# Altium PCB GearBOX-Main-OneLayer.PcbDoc
Units mm, origin at the board's own origin, x right, y up, seen from the top; angles counter-clockwise.
Board outline 46 x 68 mm, 2 copper layers (Top Layer, Bottom Layer), stack 1.18 mm thick; 34 components, 18 nets, 131 pads, 0 vias.
Unrouted connection lines stored in the file: 1.
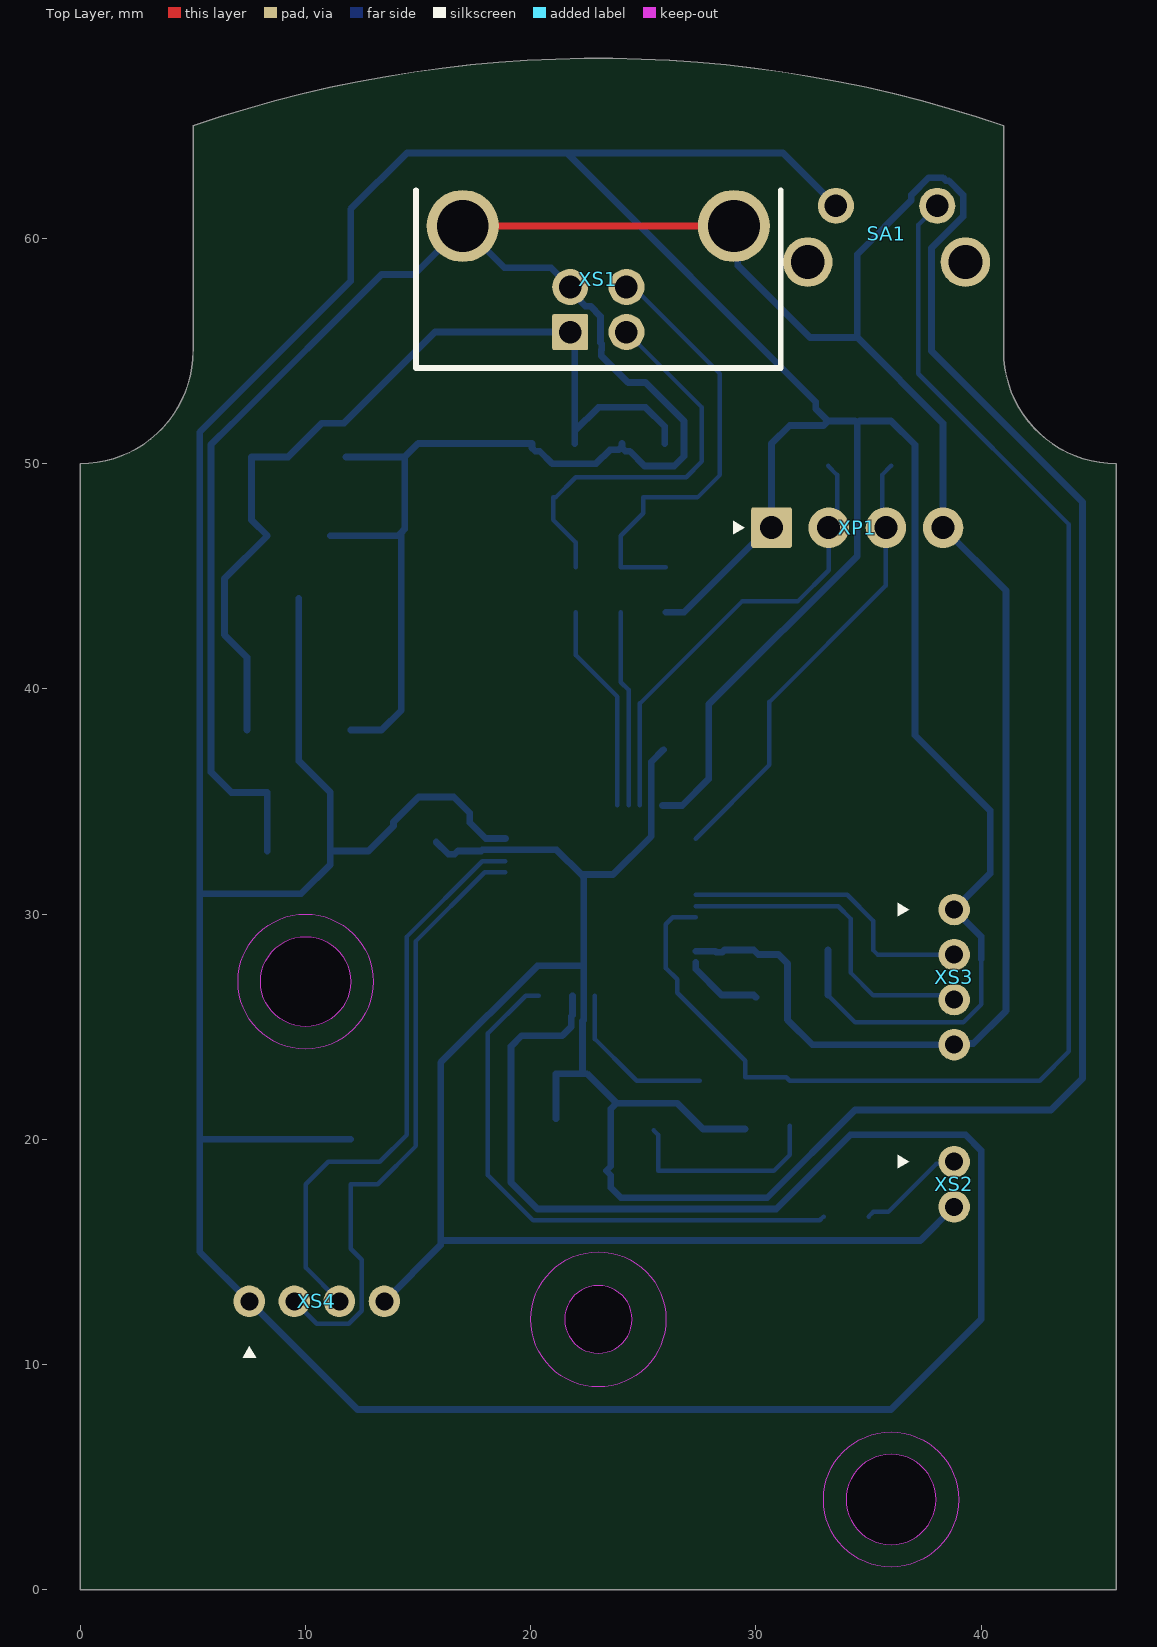
[diagram p0: Top Layer view]
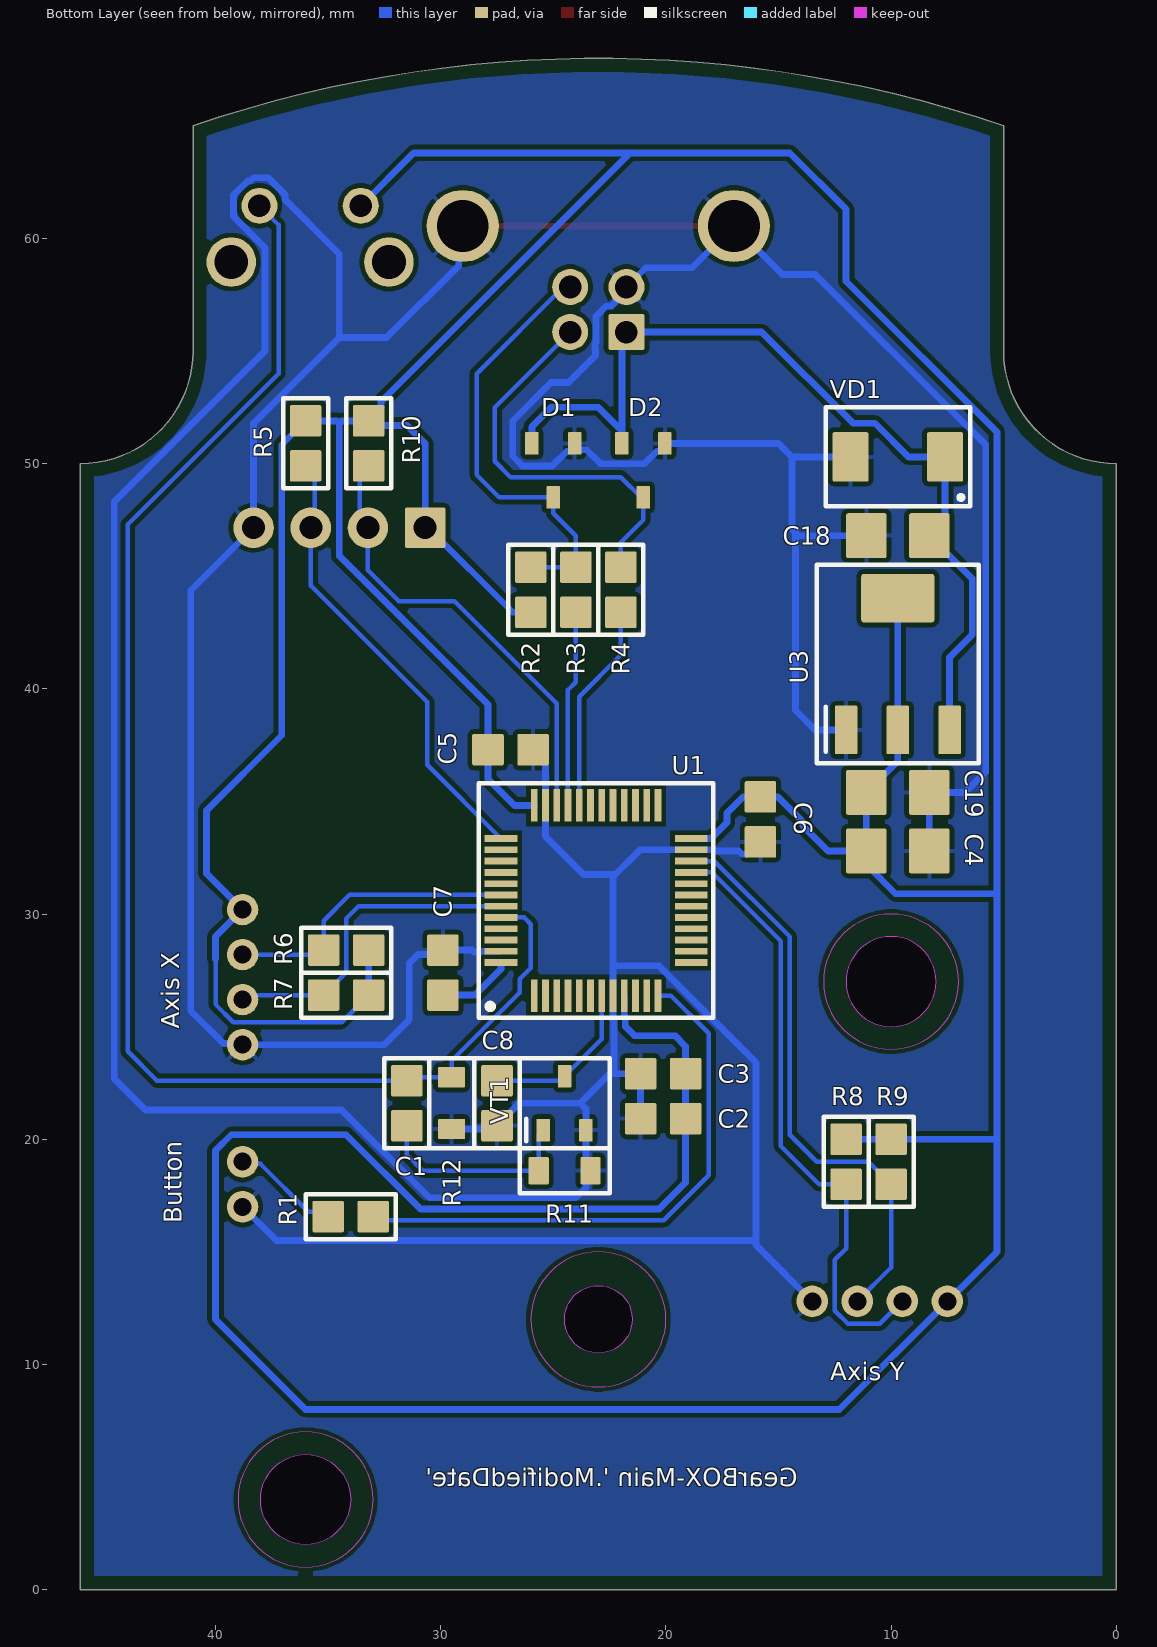
[diagram p1: Bottom Layer view, seen from below]
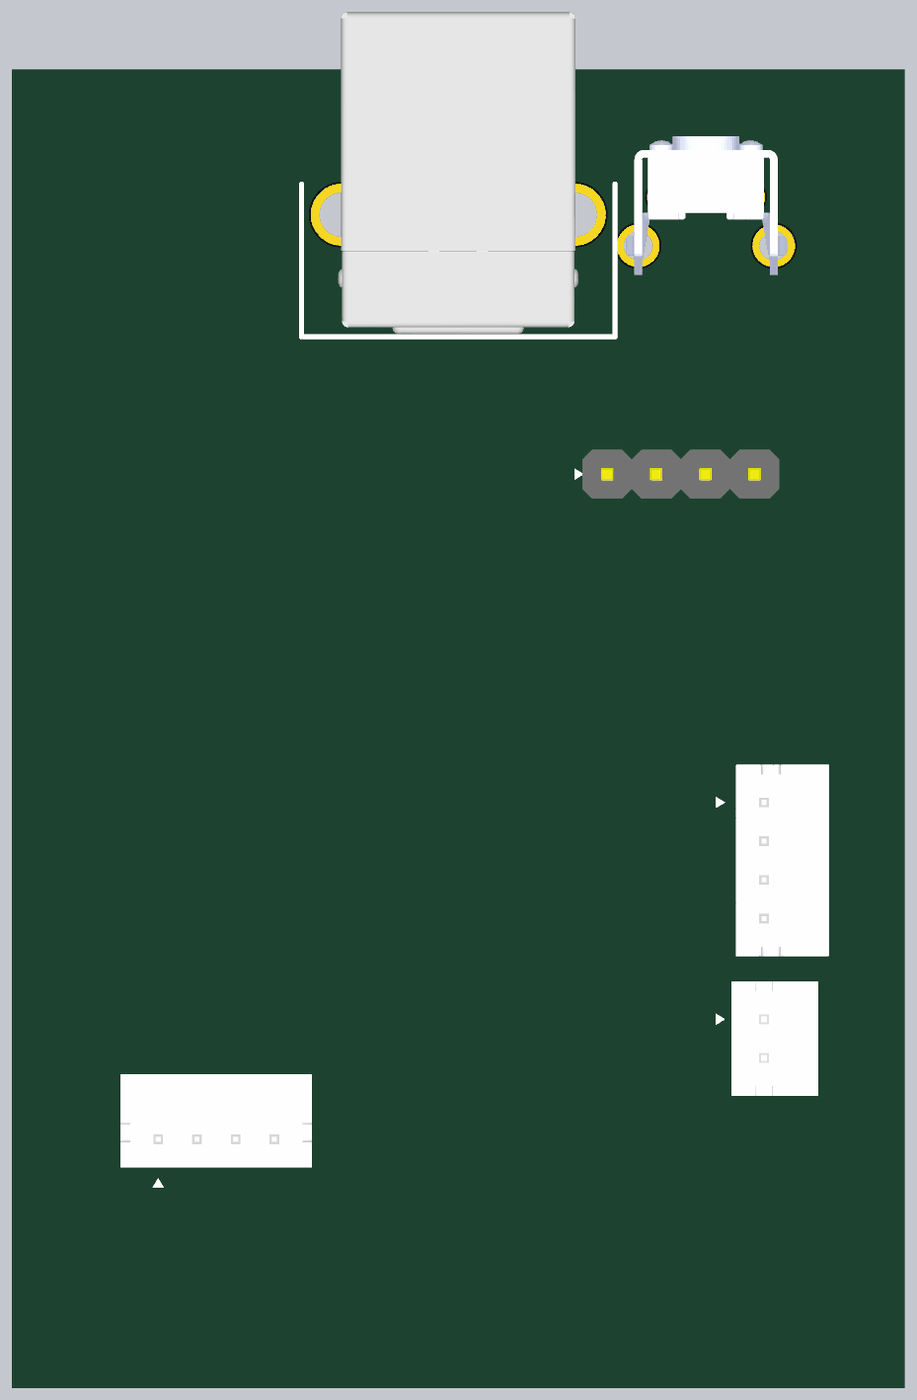
[diagram p2: 3D render of the assembled board from above, using the file's embedded part models]
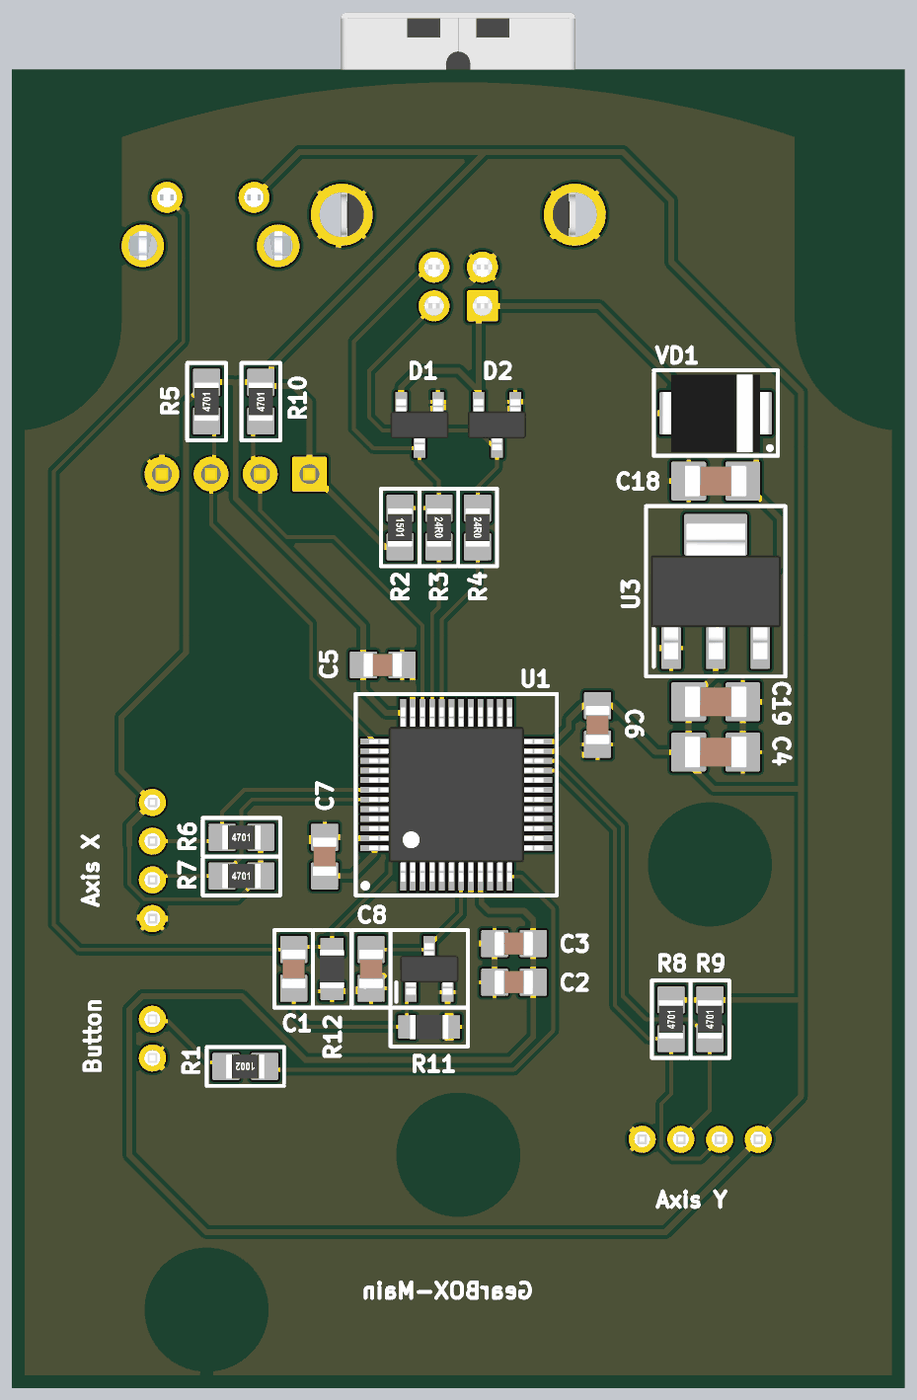
[diagram p3: 3D render of the assembled board from below, using the file's embedded part models]

## Layer stack, top to bottom
Top Solder: solder mask 0.0102, Solder Resist, Dk 3.5
Top Layer: signal copper 0.0175
Dielectric 1: core 1.145, FR4 (IPC-4101/21), Dk 4.6
Bottom Layer: signal copper 0.0175
Bottom Solder: solder mask 0.0102, Solder Resist, Dk 3.5

## Board outline
0,0 0,50 ccw(c0,55) 5,55 5,65 cw(c23,12.5) 41,65 41,55 ccw(c46,55) 46,50 46,0
cut-out: 34,4 ccw(c36,4) 36,2 ccw(c36,4) 38,4 ccw(c36,4) 36,6 ccw(c36,4)
cut-out: 21.5,12 ccw(c23,12) 23,10.5 ccw(c23,12) 24.5,12 ccw(c23,12) 23,13.5 ccw(c23,12)
cut-out: 10,25 cw(c10,27) 8,27 cw(c10,27) 10,29 cw(c10,27) 12,27 cw(c10,27)

## Design rules (kind name [scope] priority, off if disabled: settings)
AcuteAngle [All] p1: minimum=4.50000000000000E+0001 checktracksonly=TRUE
BoardOutlineClearance "NanoPi-NEO BoardOutlineClearance" [WithinRoom('NanoPi-NEO Board Room')] p1: gap=0.4 ignorepadtopadclearanceinfootprint=FALSE
BoardOutlineClearance [All] p2: gap=0.6 ignorepadtopadclearanceinfootprint=FALSE
Clearance [All] p1: gap=0.2 ignorepadtopadclearanceinfootprint=FALSE
ComponentClearance [All] p1: gap=-0.2 collisioncheckmode=3 verticalgap=0.2 showdistances=FALSE
Height "NanoPi-NEO Connector Avoid" [(WithinRoom('NanoPi-NEO Ethernet Room')or WithinRoom('NanoPi-NEO USB Room')) and OnTopLayer] p1: minheight=0 maxheight=1.2 prefheight=1
Height "NanoPi-NEO Board Avoid" [WithinRoom('NanoPi-NEO Board Room') and OnTopLayer] p2: minheight=0 maxheight=13.5 prefheight=13
Height "Height Top" [OnTop] p3: minheight=0 maxheight=20 prefheight=20
Height "Height Bottom" [OnBottom] p4: minheight=0 maxheight=3 prefheight=3
HoleSize [All] p1: absolutevalues=TRUE maxlimit=2539.975 minlimit=0.3 maxpercent=80.000 minpercent=20.000
HoleToHoleClearance [All] p1: gap=0.2 allowstackedmicrovias=TRUE
MinimumSolderMaskSliver MinimumSolderMaskSliver_1 [WithinRoom('ChargerRoom')] p1: minsoldermaskwidth=0.1
MinimumSolderMaskSliver [All] p2: minsoldermaskwidth=0.1
PolygonConnect [All] p1: thpad.connectstyle=Relief thpad.reliefconductorwidth=0.2 thpad.reliefentries=4 thpad.polygonreliefangle="45 Angle" thpad.airgapwidth=0.2 smdpad.connectstyle=Relief smdpad.reliefconductorwidth=0.2 smdpad.reliefentries=4 smdpad.polygonreliefangle="90 Angle" smdpad.airgapwidth=0.2 via.connectstyle=Direct via.reliefconductorwidth=0.254 via.reliefentries=4 via.polygonreliefangle="90 Angle" via.airgapwidth=0.254
RoutingVias [All] p1: holewidth=0.3 width=0.6 viastyle="Through Hole" minholewidth=0.3 minwidth=0.6 maxholewidth=1 maxwidth=2
SilkToSilkClearance [All] p1: silktosilkclearance=-100
SilkToSolderMaskClearance [IsPad] p1: minsilkscreentomaskgap=0 clearancetoexposedcopper=TRUE
SolderMaskExpansion ViaTent [IsVia] p1: expansion=0.102 istentingtop=TRUE
SolderMaskExpansion SolderMaskExpansion_1 [WithinRoom('ChargerRoom')] p2: expansion=0.05 istentingtop=FALSE
SolderMaskExpansion [All] p3: expansion=0.102 istentingtop=FALSE
Width [All] p1: maxlimit=10 minlimit=0.2 preferedwidth=0.2
23 further rules are at their usual default settings.

## Classes and differential pairs
component class BootUp: C1 C8 R11 R12 SA1 VT1
component class USB: D1 D2 R2 R3 R4 VD1 XS1
component class MCU: C2 C3 C4 C5 C6 C7 R1 R5 R6 R7 R8 R9 R10 U1 XP1 XS2 XS3 XS4
component class SUPPLY_DC3V3: C18 C19 U3

## Components (designator, comment, footprint, x,y, rotation, side; value= is the part's Value field where it differs from the comment)
C1 "CL21B104MBFNNNE" "Normal_Capacitor_Standard_0805-L2000-W1250-BW500-H1350 - OVERLAY" 31.5,21.6 r270 bottom value=100N/X7R/50V/±20%
C2 "CL21B105MBFNNNE" Normal_Capacitor_Standard_0805-L2000-W1250-BW500-H1350 20.125,20.912 r180 bottom value=1U/X7R/50V/±20%
C3 "CL21B104MBFNNNE" Normal_Capacitor_Standard_0805-L2000-W1250-BW500-H1350 20.125,22.912 r180 bottom value=100N/X7R/50V/±20%
C4 "CL31B475KBHNNNE" Normal_Capacitor_Standard_1206-L3200-W1600-BW1250-H1600 9.7,32.8 r0 bottom value=4U7/X7R/50V/±10%
C5 "CL21B104MBFNNNE" Normal_Capacitor_Standard_0805-L2000-W1250-BW500-H1350 26.9,37.3 r0 bottom value=100N/X7R/50V/±20%
C6 "CL21B104MBFNNNE" Normal_Capacitor_Standard_0805-L2000-W1250-BW500-H1350 15.8,34.2 r90 bottom value=100N/X7R/50V/±20%
C7 "CL21B104MBFNNNE" Normal_Capacitor_Standard_0805-L2000-W1250-BW500-H1350 29.9,27.4 r270 bottom value=100N/X7R/50V/±20%
C8 "CL21B104MBFNNNE" "Normal_Capacitor_Standard_0805-L2000-W1250-BW500-H1350 - OVERLAY" 27.5,21.6 r90 bottom value=100N/X7R/50V/±20%
C18 "CL31B106KBHNNNE" Normal_Capacitor_Standard_1206-L3200-W1600-BW1250-H1600 9.7,46.8 r180 bottom value=10U/X7R/50V/±10%
C19 "CL31B106KBHNNNE" Normal_Capacitor_Standard_1206-L3200-W1600-BW1250-H1600 9.7,35.4 r0 bottom value=10U/X7R/50V/±10%
D1 "BAV99L" 3-SOT23 25,49.7 r270 bottom
D2 "BAV99L" 3-SOT23 21,49.7 r270 bottom
R1 "CR0805-10K-1%" SMD_RES_0805-L2000-W1250-H500-M1002 34,16.565 r0 bottom value=10K/1%
R2 "CR0805-1K5-1%" SMD_RES_0805-L2000-W1250-H500-M1501 26,44.4 r270 bottom value=1K5/1%
R3 "CR0805-24R-1%" SMD_RES_0805-L2000-W1250-H500-M24R0 24,44.4 r270 bottom value=24R/1%
R4 "CR0805-24R-1%" SMD_RES_0805-L2000-W1250-H500-M24R0 22,44.4 r270 bottom value=24R/1%
R5 "CR0805-4K7-1%" SMD_RES_0805-L2000-W1250-H500-M4701 33.2,50.9 r90 bottom value=4K7/1%
R6 "CR0805-4K7-1%" SMD_RES_0805-L2000-W1250-H500-M4701 34.2,28.4 r180 bottom value=4K7/1%
R7 "CR0805-4K7-1%" SMD_RES_0805-L2000-W1250-H500-M4701 34.2,26.4 r180 bottom value=4K7/1%
R8 "CR0805-4K7-1%" SMD_RES_0805-L2000-W1250-H500-M4701 12,19 r90 bottom value=4K7/1%
R9 "CR0805-4K7-1%" SMD_RES_0805-L2000-W1250-H500-M4701 10,19 r90 bottom value=4K7/1%
R10 "CR0805-4K7-1%" SMD_RES_0805-L2000-W1250-H500-M4701 36,50.9 r90 bottom value=4K7/1%
R11 "RC2012(0805)" CHIPRESISTOR-0805-L2000-W1250-B350-H550-Overlay-L4000-W2000 24.5,18.6 r0 bottom value=100K/1%
R12 "RC2012(0805)" CHIPRESISTOR-0805-L2000-W1250-B350-H550-Overlay-L4000-W2000 29.518,21.6 r90 bottom value=10K/1%
SA1 "DS1041-21-2038KKA10010" DS1041-21-2038KKA10010 35.8,60.2 r0 top
U1 "STM32F072C8T6TR" 48-LQFP 23.1,30.6 r90 bottom
U3 "LM1117DT-3.3/NOPB" SOT223 9.7,41.1 r90 bottom
VD1 "SMBJ5.0A" 2-MOLDED-E4600-D4000-A2700-H5600-B2200 9.7,50.3 r0 bottom
VT1 "BSS138" "3-SOT23 - OVERLAY" 24.5,21.6 r90 bottom
XP1 "DS1021-1X04SF11-B" DS1021-1X04SF11-B 34.5,47.155 r0 top
XS1 "DS1099-WN0" DS1099 23,58.2 r180 top locked
XS2 "DS1066-02MVW6X" DS1066-02MVW6X 38.8,18 r270 top
XS3 "DS1066-04MVW6X" DS1066-04MVW6X 38.8,27.2 r270 top
XS4 "DS1066-04MVW6X" DS1066-04MVW6X 10.5,12.8 r0 top

## Footprints (in the part's own frame and the unit in brackets; to place one, negate y for a bottom-side part, rotate by r counter-clockwise, add the part's x,y. Pads: shape width x height; smd on the part's side, far side on the other; paste and mask are expansions set on the pad)
2-MOLDED-E4600-D4000-A2700-H5600-B2200 [mm]
  rrect10% 1.6x2.2 smd: 1(-2.1,0) 2(2.1,0)
  silkscreen extent -3.21,-2.21 3.2,2.2, body extent -2.8,-2 2.8,2, height 2.7
3-SOT23 [mm] "SOT23, 3-Leads, Body 2,90x2,37mm, Pitch 0,95mm, IPC Medium Density"
  rrect10% 1x0.6 smd: 1(-1.2,0.95) 2(-1.2,-0.95) 3(1.2,0)
  body extent -1.32,-1.5 1.32,1.5, height 1.1
"3-SOT23 - OVERLAY" [mm] "SOT23, 3-Leads, Body 2,90x2,37mm, Pitch 0,95mm, IPC Medium Density"
  rrect10% 1x0.6 smd: 1(-1.2,0.95) 2(-1.2,-0.95) 3(1.2,0)
  silkscreen extent -2,-2 2,2, body extent -1.32,-1.5 1.32,1.5, height 1.1
48-LQFP [mm] "TSQFP, 48-Leads, Body 7,00x7,00mm, Pitch 0,50mm, IPC Medium Density"
  rect 1.45x0.3 smd: 1(-4.225,2.75) 2(-4.225,2.25) 3(-4.225,1.75) 4(-4.225,1.25) 5(-4.225,0.75) 6(-4.225,0.25) 7(-4.225,-0.25) 8(-4.225,-0.75) 9(-4.225,-1.25) 10(-4.225,-1.75) 11(-4.225,-2.25) 12(-4.225,-2.75) 25(4.225,-2.75) 26(4.225,-2.25) 27(4.225,-1.75) 28(4.225,-1.25) 29(4.225,-0.75) 30(4.225,-0.25) 31(4.225,0.25) 32(4.225,0.75) 33(4.225,1.25) 34(4.225,1.75) 35(4.225,2.25) 36(4.225,2.75)
  rect 0.3x1.45 smd: 13(-2.75,-4.225) 14(-2.25,-4.225) 15(-1.75,-4.225) 16(-1.25,-4.225) 17(-0.75,-4.225) 18(-0.25,-4.225) 19(0.25,-4.225) 20(0.75,-4.225) 21(1.25,-4.225) 22(1.75,-4.225) 23(2.25,-4.225) 24(2.75,-4.225) 37(2.75,4.225) 38(2.25,4.225) 39(1.75,4.225) 40(1.25,4.225) 41(0.75,4.225) 42(0.25,4.225) 43(-0.25,4.225) 44(-0.75,4.225) 45(-1.25,4.225) 46(-1.75,4.225) 47(-2.25,4.225) 48(-2.75,4.225)
  silkscreen extent -5.2,-5.2 5.2,5.2, body extent -4.5,-4.5 4.5,4.5, height 1.6
CHIPRESISTOR-0805-L2000-W1250-B350-H550-Overlay-L4000-W2000 [mm] "Chip Resistor, 2-Leads, Body 2.000x1.250x0.550mm, IPC Medium Density"
  rrect10% 0.9x1.2 smd: 1(-1.15,0) 2(1.15,0)
  silkscreen extent -2,-1 2,1, body extent -1,-0.63 1,0.63, height 0.5
DS1021-1X04SF11-B [mm] "2.54mm Pin Header V/T Type"
  rrect10% 1.8x1.8 hole 1.02: 1(-3.81,0)
  round 1.8 hole 1.02: 2(-1.27,0) 3(1.27,0) 4(3.81,0)
  silkscreen extent -5.5,-0.3 -5,0.3, body extent -5.08,-1.27 5.08,1.27, height 8.6
DS1041-21-2038KKA10010 [mm] "6.1x6.1mm Tact Switch R/A 2 Position Type"
  round 1.6 hole 1: 1(2.25,1.25) 2(-2.25,1.25)
  round 2.2 hole 1.5: ""(-3.5,-1.25) ""(3.5,-1.25)
  body extent -4.16,-2.75 4.16,4.4, height 7.11
DS1066-02MVW6X [mm] "PCB Connector 2.5mm XH Type"
  round 1.4 hole 0.8: 1(-1,0) 2(1,0)
  silkscreen extent -1.3,-2.5 -0.7,-2, body extent -2.95,-1.7 2.95,2.8, height 6.01
DS1066-04MVW6X [mm] "PCB Connector 2.5mm XH Type"
  round 1.4 hole 0.8: 1(-3,0) 2(-1,0) 3(1,0) 4(3,0)
  silkscreen extent -3.3,-2.5 -2.7,-2, body extent -4.95,-1.45 4.95,3.35, height 6.01
DS1099 [mm] "USB Type-B R/A DIP Type Connector"
  rrect10% 1.6x1.6 hole 1: 1(1.25,2.355)
  round 1.6 hole 1: 2(-1.25,2.355) 3(-1.25,0.355) 4(1.25,0.355)
  round 3.2 hole 2.3: SH(-6.02,-2.355) SH(6.02,-2.355)
  silkscreen extent -8.1,-3.94 8.1,3.96, body extent -6.2,-12.8 6.2,3.8, height 11.01
Normal_Capacitor_Standard_0805-L2000-W1250-BW500-H1350 [mm]
  rrect10% 1.4x1.4 smd: 1(-1,0) 2(1,0)
  body extent -1,-0.63 1,0.63, height 1.35
"Normal_Capacitor_Standard_0805-L2000-W1250-BW500-H1350 - OVERLAY" [mm]
  rrect10% 1.4x1.4 smd: 1(-1,0) 2(1,0)
  silkscreen extent -2,-1 2,1, body extent -1,-0.63 1,0.63, height 1.35
Normal_Capacitor_Standard_1206-L3200-W1600-BW1250-H1600 [mm]
  rrect10% 1.8x2 smd: 1(-1.4,0) 2(1.4,0)
  body extent -1.6,-0.8 1.6,0.8, height 1.6
SMD_RES_0805-L2000-W1250-H500-M24R0 [mm] "Chip Resistor, 2-Leads, Body 2.000x1.250x0.500mm, IPC Medium Density"
  rrect10% 1.4x1.4 smd: 1(-1,0) 2(1,0)
  silkscreen extent -2,-1 2,1, body extent -1,-0.63 1,0.63, height 0.5
SMD_RES_0805-L2000-W1250-H500-M1002 [mm] "Chip Resistor, 2-Leads, Body 2.000x1.250x0.500mm, IPC Medium Density"
  rrect10% 1.4x1.4 smd: 1(-1,0) 2(1,0)
  silkscreen extent -2,-1 2,1, body extent -1,-0.63 1,0.63, height 0.5
SMD_RES_0805-L2000-W1250-H500-M1501 [mm] "Chip Resistor, 2-Leads, Body 2.000x1.250x0.500mm, IPC Medium Density"
  rrect10% 1.4x1.4 smd: 1(-1,0) 2(1,0)
  silkscreen extent -2,-1 2,1, body extent -1,-0.63 1,0.63, height 0.5
SMD_RES_0805-L2000-W1250-H500-M4701 [mm] "Chip Resistor, 2-Leads, Body 2.000x1.250x0.500mm, IPC Medium Density"
  rrect10% 1.4x1.4 smd: 1(-1,0) 2(1,0)
  silkscreen extent -2,-1 2,1, body extent -1,-0.63 1,0.63, height 0.5
SOT223 [mm] "SOT223, 4-Leads, Body 6,50x7,00mm (avg), Pitch 2,30mm, IPC Medium Density"
  rrect10% 2.15x1 smd: 1(-2.925,2.3) 2(-2.925,0) 3(-2.925,-2.3)
  rrect10% 2.15x3.25 smd: 4(2.925,0)
  silkscreen extent -4.4,-3.6 4.4,3.6, body extent -3.5,-3.35 3.5,3.35, height 1.8

## Part data
C1 C8: "Ceramic Capacitor SMD 0805", Manufacturer="SAMSUNG ELECTRO-MECHANICS"
C2 C3 C4 C5 C6 C7: "Ceramic Capacitor SMD 0805"
C18 C19: "Ceramic Capacitor SMD 1210"
D1 D2 VD1: "Single high-speed switching diodes, fabricated in planar technology, and encapsulated in small hermetically sealed glass SOD80C Surface-Mounted Device (SMD) packages."
R1 R2 R3 R4 R5 R6 R7 R8 R9 R10: "Film resistor SMD 0805"
R11 R12: "Samsung Chip Resistors General Standard 0805", Manufacturer="SAMSUNG ELECTRO-MECHANICS"
SA1: "6.1x6.1mm Tact Switch R/A 2 Position Type", Manufacturer="CONNFLY ELECTRONIC CO.,LTD."
U1: "Arm®-based 32-bit MCU, up to 128 KB Flash, crystal-less USB /  FS 2.0, CAN, 12 timers, ADC, DAC & comm. interfaces, 2.0 - 3.6 V"
XS1: "USB Type-B R/A DIP Type Connector", Manufacturer="Connfly Electronic Co. Ltd"
XS2 XS3 XS4: Manufacturer="CONNFLY ELECTRONIC CO.,LTD."

## Nets (pads, with @x,y where several pads share a name; then routed paths per layer and width w, separated by ;. In a path a pad name is that pad's centre, name@x,y a point inside that pad or via, vN(x,y) a via of type N, cw(c..) or ccw(c..) an arc to the next point about the centre after c; other vN are vias at no path point)
BOOT: C1.1 R12.2 SA1.1 U1.44 | length 65.4
  Bottom Layer w0.2: U1.44 26.3,29.85 26,29.55 26,27.6 26.5,27.1 26.5,26.5 29.518,23.482 R12.2 31.35,22.75 C1.1 42.6,22.6 43.9,23.9 43.9,47.3 37.2,54 37.2,60.6 SA1.1
BUTTON: R1.1 U1.12 | length 25
  Bottom Layer w0.2: U1.12 19.775,26.375 18.1,24.7 18.1,18.4 20.1,16.4 32.835,16.4 R1.1
DC3V3: C2.2 C3.2 C4.2 C5.2 C6.2 C7.2 C19.2 R2.2 R5.2 R6.2 R7.2 R8.2 R9.2 R10.2 SA1.2 U1.9 U1.24 U1.36 U1.48 U3.2 U3.4 XP1.1 XS3.1 XS4.1 | length 283.8
  Bottom Layer w0.2: R7.2 34.4,25.2 39.214,25.2 40,25.986 40,28
  Bottom Layer w0.3: U3.4 U3.2 9.7,36.8 C19.2 C4.2 ; R8.2 R9.2 5.3,20 ; U1.24 18,33.35 17.289,34.061 17.289,34.489 16.578,35.2 C6.2 15.022,35.2 13.909,34.087 13.909,33.913 12.796,32.8 C4.2 ; U1.9 21.85,25.505 21.8,25.455 21.8,25 21.4,24.6 19.6,24.6 19.125,24.125 C3.2 C2.2 19.125,18.075 20.3,16.9 24.707,16.9 30.9,16.9 34.2,20.2 39.3,20.2 40,19.5 40,12 36,8 12.3,8 XS4.1 5.3,15 5.3,20 ; U1.36 26.725,34.825 27.9,36 C5.2 27.9,39.3 34.5,45.9 34.5,51.8 ; R2.2 26.8,43.4 30.555,47.155 XP1.1 30.69,50.89 31.5,51.7 33,51.7 R5.2 ; U1.48 27.325,27.55 28.475,26.4 C7.2 C7.2@30,26.3 ; R7.2 R6.2 ; SA1.2 31.2,63.8 21.6,63.8 ; 40,28 40,29 XS3.1 40.4,31.8 40.4,34.6 37.06,37.94 37.06,50.84 R10.2 34.6,51.9 34.5,51.8 ; 5.3,20 5.3,30.9 ; 5.3,30.9 5.3,51.4 12,58.1 12,61.3 14.5,63.8 21.6,63.8 ; 5.3,30.9 9.8,30.9 11.1,32.2 C4.2 ; 21.6,63.8 32.652,52.748 32.652,52.448 R5.2 ; R5.2 34.4,51.9 34.5,51.8
DC5V: C18.2 D1.2 D2.2 U3.3 VD1.1 XS1.1 | length 40.6
  Bottom Layer w0.3: U3.3 7.4,41.4 6.4,42.4 6.4,44.9 C18.2 7.6,47.5 VD1.1 9.225,50.3 10.725,51.8 11.7,51.8 15.745,55.845 XS1.1 21.95,55.645 21.95,51.45 ; D2.2 21.95,51.45 ; D1.2 25.95,51.65 25.1,52.5 23,52.5 21.95,51.45
GND: C2.1 C3.1 C4.1 C5.1 C6.1 C7.1 C8.1 C18.1 C19.1 D1.1 D2.1 R11.1 R12.1 U1.8 U1.23 U1.35 U1.47 U3.1 VD1.2 VT1.2 XP1.4 XS1.4 XS1.SH XS2.2 XS3.4 XS4.4 | length 314.8
  Top Layer w0.3: XS1.SH@16.98,60.555 XS1.SH@29.02,60.555
  Bottom Layer w0.3: C4.1 C19.1 6.7,35.4 6.601,35.499 5.8,36.3 5.8,50.848 6.702,51.75 6.721,51.75 13.371,58.4 14.825,58.4 16.98,60.555 18.835,58.7 20.895,58.7 XS1.4 21.75,57.664 22.419,56.995 22.648,56.995 23.1,56.543 23.1,55.369 23.148,55.32 23.148,55.072 23.124,55.047 23.124,54.799 24.323,53.6 25.1,53.6 26.8,51.9 26.8,50.33 26.37,49.9 25.05,49.9 24.4,50.55 24.2,50.55 24.05,50.7 D1.1@24.05,50.766 ; C18.1 14.1,46.8 14.25,46.95 ; VD1.2 14.4,50.3 ; U3.1 13.375,38.175 14.25,39.05 14.25,46.95 ; XS4.4 16,15.3 16,15.5 ; C6.1 16.347,32.653 16.617,32.653 16.764,32.8 17.8,32.8 17.85,32.85 U1.23 21.15,32.85 22.25,31.75 ; C2.1 C3.1 22.3,22.912 ; D1.1 D1.1@24.05,50.766 ; C5.1 25.35,36.75 U1.35 25.35,33.45 23.65,31.75 22.25,31.75 ; U1.47 28.195,28.35 28.245,28.3 28.5,28.3 28.6,28.4 C7.1 30.1,28.2 31,28.2 31.4,27.8 31.4,25.3 32.5,24.2 XS3.4 38.85,24.25 39.65,24.25 41.1,25.7 41.1,44.365 XP1.4 38.31,51.79 34.5,55.6 ; XS1.SH@29.02,60.555 29.195,60.38 29.195,58.805 32.4,55.6 34.5,55.6 ; R12.1 27.65,20.45 C8.1 26.5,21.6 23.8,21.6 ; XS2.2 37.3,15.5 16,15.5 ; 14.25,46.95 14.4,47.1 14.4,50.3 ; 14.4,50.3 15,50.9 D2.1 20.05,50.7 20.2,50.55 20.4,50.55 20.95,50 22.9,50 23.516,50.616 23.9,50.616 D1.1@24.05,50.766 ; 16,15.5 16,23.4 20.3,27.7 22.35,27.7 ; 22.25,31.75 22.35,31.65 22.35,27.7 ; 22.3,22.912 22.488,22.912 23.8,21.6 ; 22.3,22.912 22.3,25.248 22.35,25.298 22.35,25.712 U1.8 22.35,27.7 ; 23.8,21.6 23.55,21.35 VT1.2 23.55,18.8 R11.1 23.55,18.4 23.55,17.85 24,17.4 30.5,17.4 34.4,21.3 43.1,21.3 44.5,22.7 44.5,48.3 37.8,55 37.8,59.574 39.2,60.974 39.2,61.926 38.563,62.563 38.437,62.563 38.3,62.7 37.674,62.7 36.9,61.926 36.9,61.7 34.5,59.3 34.5,55.6
NetC1_2: C1.2 R11.2 VT1.1 | length 9.3
  Bottom Layer w0.2: VT1.1 25.65,20.2 R11.2 30.8,18.6 31.5,19.3 C1.2
NetR1_2: R1.2 XS2.1 | length 4.8
  Bottom Layer w0.2: R1.2 35.218,16.783 35.883,16.783 38,18.9 38.7,18.9 XS2.1
NetR5_1: R5.1 U1.34 XP1.2 | length 20.3
  Bottom Layer w0.2: U1.34 24.85,35.559 24.85,39.35 29.4,43.9 31.864,43.9 33.23,45.266 XP1.2 33.6,47.525 33.6,49.5 R5.1
NetR6_1: R6.1 U1.42 XS3.2 | length 13.3
  Bottom Layer w0.2: U1.42 34.05,30.85 35.2,29.7 R6.1 35.4,28.2 XS3.2
NetR7_1: R7.1 U1.43 XS3.3 | length 14.6
  Bottom Layer w0.2: U1.43 33.65,30.35 34.2,29.8 34.2,27.4 R7.1 38.6,26.4 XS3.3
NetR8_1: R8.1 U1.21 XS4.2 | length 27.4
  Bottom Layer w0.2: XS4.2 10.5,11.8 11.914,11.8 12.5,12.386 12.5,14.643 12,15.143 R8.1 13.2,18 14.9,19.7 14.9,28.8 17.95,31.85 U1.21
NetR9_1: R9.1 U1.22 XS4.3 | length 25.8
  Bottom Layer w0.2: XS4.3 10,14.3 R9.1 11,19 13.3,19 14.5,20.2 14.5,29 17.85,32.35 U1.22
NetR10_1: R10.1 U1.37 XP1.3 | length 20.3
  Bottom Layer w0.2: U1.37 30.6,36.625 30.6,39.417 35.77,44.587 XP1.3 35.6,47.325 35.6,49.5 R10.1
NRST: C8.2 U1.7 VT1.3 | length 7.3
  Bottom Layer w0.2: U1.7 22.85,24.45 VT1.3 24.7,22.6 C8.2
USB_DM: D2.3 R4.1 XS1.2 | length 17.9
  Bottom Layer w0.2: R4.1 22,46.5 21,47.5 D2.3 21.1,48.5 22,49.4 25.086,49.4 26.9,49.4 27.6,50.1 27.6,52.495 XS1.2
USB_DM_P: R4.2 U1.32 | length 9.3
  Bottom Layer w0.2: R4.2 22,41.5 23.85,39.65 U1.32
USB_DP: D1.3 R2.1 R3.1 XS1.3 | length 19.6
  Bottom Layer w0.2: XS1.3 24.555,57.845 28.4,54 28.4,49.5 27.4,48.5 D1.3 25,47.8 24,46.8 R3.1 R2.1
USB_DP_P: R3.2 U1.33 | length 8.7
  Bottom Layer w0.2: R3.2 24,40.3 24.35,39.95 U1.33
pads on no net: SA1. U1.1 U1.2 U1.3 U1.4 U1.5 U1.6 U1.10 U1.11 U1.13 U1.14 U1.15 U1.16 U1.17 U1.18 U1.19 U1.20 U1.25 U1.26 U1.27 U1.28 U1.29 U1.30 U1.31 U1.38 U1.39 U1.40 U1.41 U1.45 U1.46

## Polygon pours and split planes (outlines as drawn)
GND on Bottom Layer "NONET_L-01_P-001" (solid, remove dead copper, pour order 1): 0,68 46,68 46,0 0,0

## Keep-outs
Keep-Out Layer:
  region: 36,1 cw(c36,4) 33,4 cw(c36,4) 36,7 cw(c36,4) 39,4 cw(c36,4)
  region: 23,9 cw(c23,12) 20,12 cw(c23,12) 23,15 cw(c23,12) 26,12 cw(c23,12)
  region: 10,24 cw(c10,27) 7,27 cw(c10,27) 10,30 cw(c10,27) 13,27 cw(c10,27)

## Silkscreen, mask and mechanical layers (free items; w line width, h text height)
Bottom Overlay:
  text "Axis X" at 41.6,24.901 h0.8 r270
  text "Button" at 41.5,16.267 h0.8 r270
  text "Axis Y" at 12.699,9.3 h0.8
  text "GearBOX-Main '.ModifiedDate'" at 14.136,4.6 h0.8
Board:
  lines w0.1: 0,0 46,0 46,50 cw(c46,55) 41,55 41,65 ccw(c23,12.5) 5,65 5,55 cw(c0,55) 0,50 0,0 ; 8,27 cw(c10,27) 10,29 cw(c10,27) 12,27 cw(c10,27) 10,25 cw(c10,27) 8,27 ; 21.5,12 cw(c23,12) 23,13.5 cw(c23,12) 24.5,12 cw(c23,12) 23,10.5 cw(c23,12) 21.5,12 ; 34,4 cw(c36,4) 36,6 cw(c36,4) 38,4 cw(c36,4) 36,2 cw(c36,4) 34,4
Board Shape:
  circle w0.1: c36,4 r3
  circle w0.1: c23,12 r3
  circle w0.1: c10,27 r3
  circle w0.05: c23,0 r0.025
  circle w0.1: c23,12 r1.5
  circle w0.1: c36,4 r2
  circle w0.1: c10,27 r2
  lines w0.1: 0,0 0,50 ccw(c0,55) 5,55 5,65 cw(c23,12.5) 41,65 41,55 ccw(c46,55) 46,50 46,0 0,0